# EAGLE board newMain (EAGLE 8.7.0)
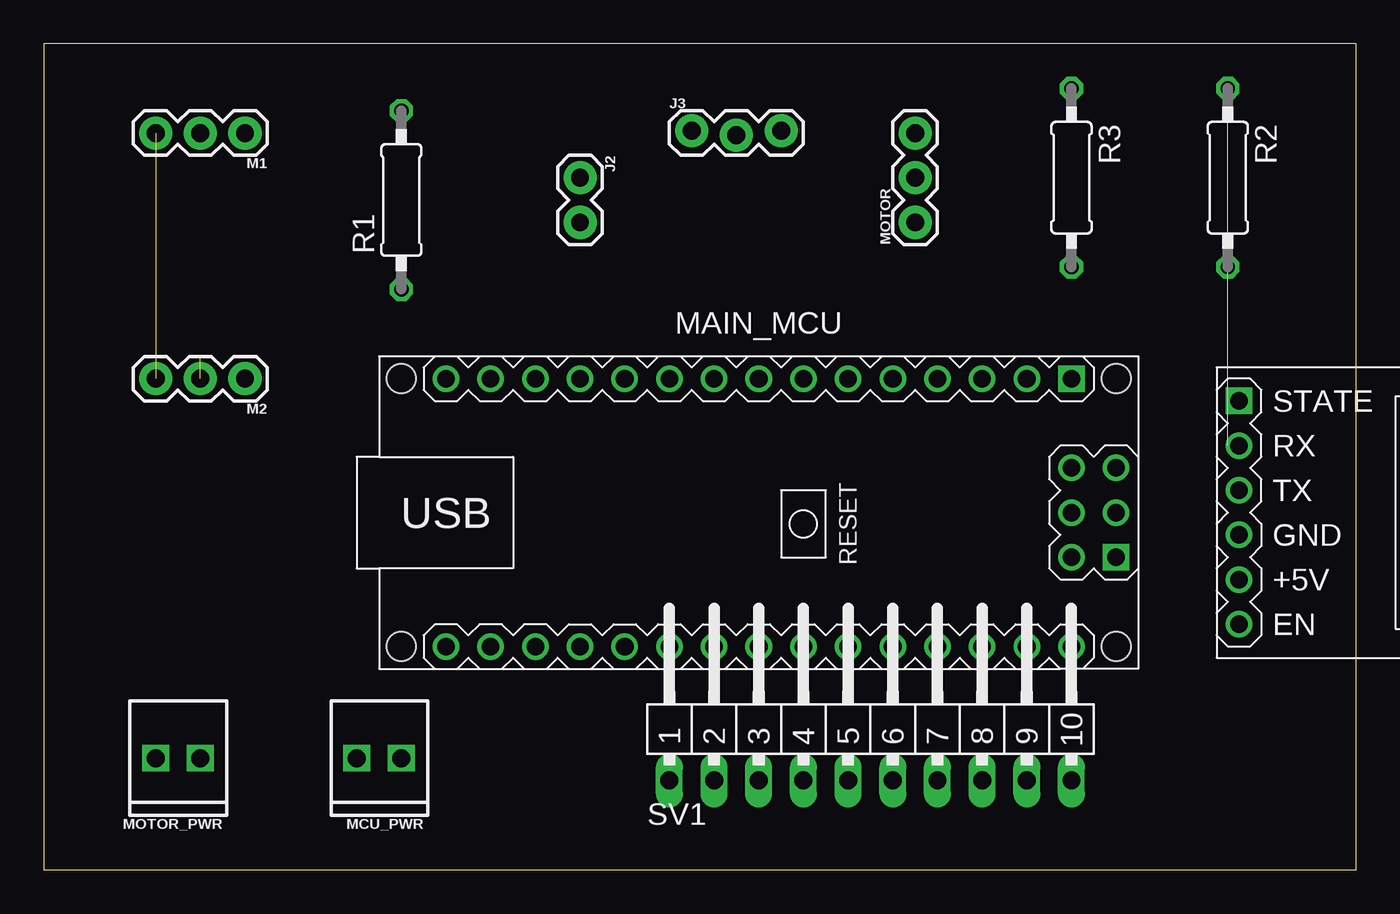
[diagram p0: board, top side]
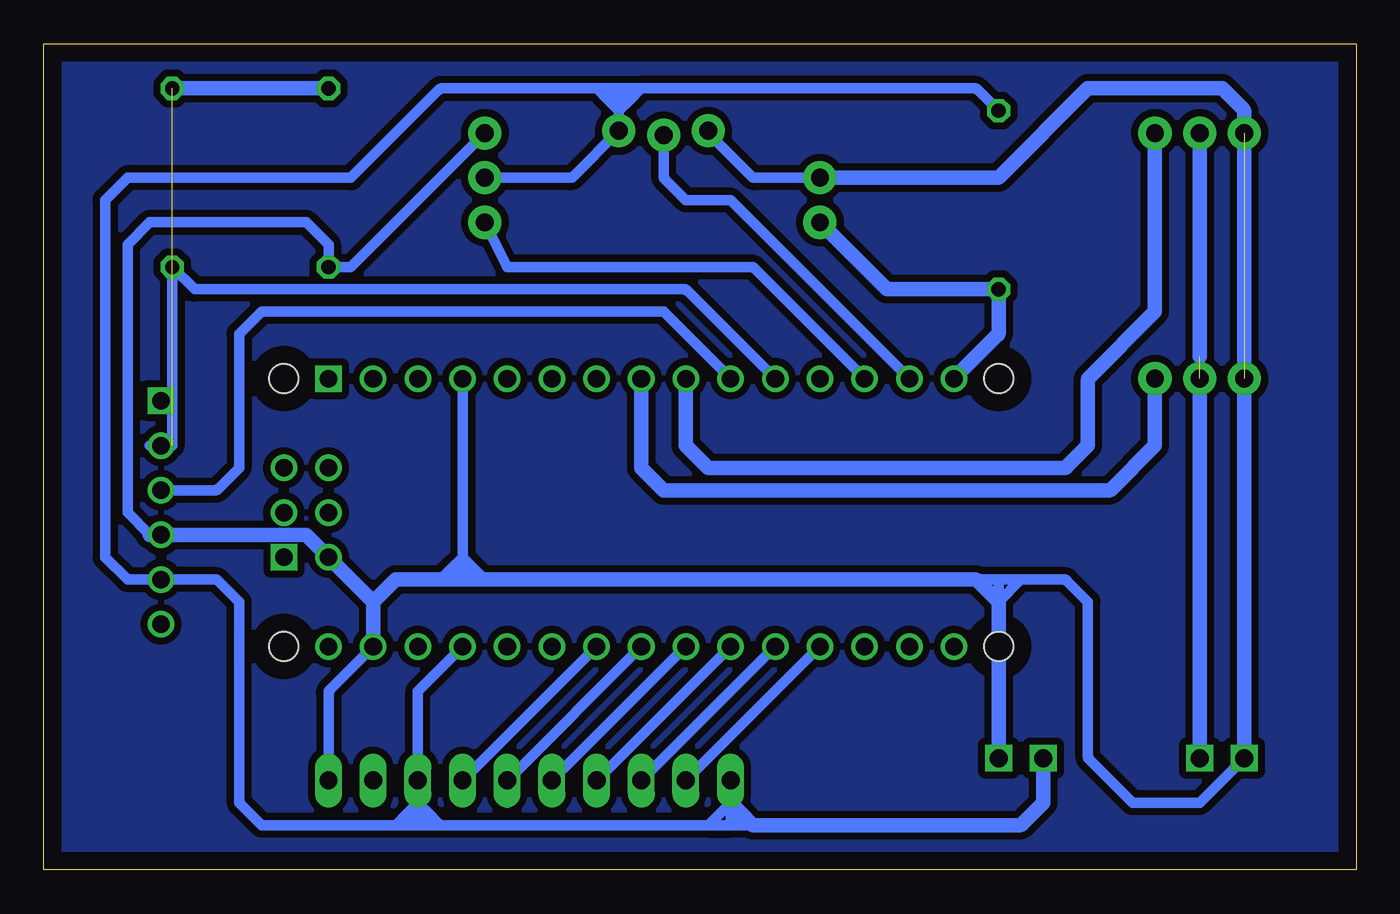
[diagram p1: board, bottom side, seen from below]

Size 74.6 x 46.98 mm. Coordinates in mm from the lower left corner, seen from the top.
Outline: 0,0 74.6,0 74.6,46.98 0,46.98 0,0
Copper layers (1*16): Top 0.035mm / dielectric 1.5mm / Bottom 0.035mm
Design rules "default": minimum track width 6mil, minimum drill 0.35mm, track to track 6mil, track to pad 6mil, pad to pad 6mil, via to via 6mil, smd to smd 6mil, copper to edge 40mil, drill to drill 6mil, minimum pad ring 10mil, minimum via ring 8mil, stop-mask expansion 4mil, vias tented up to drill 0mil, thermal gap 10mil

## Footprints (pad centres in the part's own frame; a part is rotated, then mirrored left to right if it is on the bottom)
1X02 = drill 1.016 pad 1.88: 1 0,0; 2 2.54,0
1X03_LOCK = drill 1.016 pad 1.88: 1 0,0.127; 2 2.54,-0.127; 3 5.08,0.127
1X03 = drill 1.016 pad 1.88: 1 0,0; 2 2.54,0; 3 5.08,0
ARDUINO-NANO-3.0#ISP = drill 1 square: J1.1 17.78,7.62; J4.1 20.32,-2.54 | drill 1: J1.2 15.24,7.62; J1.3 12.7,7.62; J1.4 10.16,7.62; J1.5 7.62,7.62; J1.6 5.08,7.62; J1.7 2.54,7.62; J1.8 0,7.62; J1.9 -2.54,7.62; J1.10 -5.08,7.62; J1.11 -7.62,7.62; J1.12 -10.16,7.62; J1.13 -12.7,7.62; J1.14 -15.24,7.62; J1.15 -17.78,7.62; J2.1 17.78,-7.62; J2.2 15.24,-7.62; J2.3 12.7,-7.62; J2.4 10.16,-7.62; J2.5 7.62,-7.62; J2.6 5.08,-7.62; J2.7 2.54,-7.62; J2.8 0,-7.62; J2.9 -2.54,-7.62; J2.10 -5.08,-7.62; J2.11 -7.62,-7.62; J2.12 -10.16,-7.62; J2.13 -12.7,-7.62; J2.14 -15.24,-7.62; J2.15 -17.78,-7.62; J4.2 17.78,-2.54; J4.3 20.32,0; J4.4 17.78,0; J4.5 20.32,2.54; J4.6 17.78,2.54 | hole 1.651: -20.32,7.62; -20.32,-7.62; 20.32,-7.62; 20.32,7.62
1X02_2.54_SCREWTERM = drill 1.016 square: P1 2.54,0; P2 0,0
0207/10 = drill 0.813 octagon: 1 -5.08,0; 2 5.08,0
MA10-1W = drill 1.016 long: 1 -11.43,0; 2 -8.89,0; 3 -6.35,0; 4 -3.81,0; 5 -1.27,0; 6 1.27,0; 7 3.81,0; 8 6.35,0; 9 8.89,0; 10 11.43,0
WIRELESS-BLUETOOTH-HC-05 = drill 1 square: 1 -6.35,-17.145 | drill 1: 2 -3.81,-17.145; 3 -1.27,-17.145; 4 1.27,-17.145; 5 3.81,-17.145; 6 6.35,-17.145

## Placement (x,y rotation side)
J2  [1X02]  30.48,39.37 270 top
J3  [1X03_LOCK]  36.83,41.91 0 top
M1  SERVO  [1X03]  11.43,41.91 180 top
M2  SERVO  [1X03]  11.43,27.94 180 top
MAIN_MCU  ARDUINO-NANO-3.0#ISP  [ARDUINO-NANO-3.0#ISP]  40.64,20.32 0 top
MCU_PWR  [1X02_2.54_SCREWTERM]  20.32,6.35 180 top
MOTOR  455-1750-1-ND  [1X03]  49.53,36.83 90 top
MOTOR_PWR  [1X02_2.54_SCREWTERM]  8.89,6.35 180 top
R1  1k  [0207/10]  20.32,38.1 90 top
R2  1k  [0207/10]  67.31,39.37 270 top
R3  2k  [0207/10]  58.42,39.37 270 top
SV1  [MA10-1W]  46.99,5.08 0 top
U$1  WIRELESS-BLUETOOTH-HC-05  [WIRELESS-BLUETOOTH-HC-05]  85.09,20.32 270 top

## Library data of the parts
J2 J3 MCU_PWR MOTOR_PWR = SparkFun-Connectors
M1 M2 = SparkFun-Electromechanical
MAIN_MCU U$1 = diy-modules
MOTOR = SparkFun-Connectors; PROD_ID: XXX-00000
R1-R3 = eagle-ltspice; SPICEMODEL: NONE; SPICEPREFIX: R
SV1 = con-lstb; OC_FARNELL: unknown; OC_NEWARK: unknown

## Nets
3V3: MAIN_MCU.J2.14
B0: MAIN_MCU.J2.12 SV1.2
B1: MAIN_MCU.J2.11 SV1.3
B2: MAIN_MCU.J2.10 SV1.4
B3: MAIN_MCU.J2.9 SV1.5
B4: MAIN_MCU.J2.8 SV1.6
B5: MAIN_MCU.J2.7 SV1.7
GND: J2.1 J3.1 M1.3 M2.3 MAIN_MCU.J1.4 MAIN_MCU.J2.2 MCU_PWR.P2 MOTOR.3 MOTOR_PWR.P1 R3.2 SV1.10 U$1.4
MAGNET: J2.2 MAIN_MCU.J1.15 R1.1
MOTOR: MAIN_MCU.J1.13 MOTOR.1
N$5: R2.1 R3.1 U$1.2
OPT: J3.2 MAIN_MCU.J1.14
RX_BLE: MAIN_MCU.J1.11 R2.2
RX_MAIN: MAIN_MCU.J1.2
SEV_1: M2.1 MAIN_MCU.J1.8
SEV_2: M1.1 MAIN_MCU.J1.9
TX_BLE: MAIN_MCU.J1.10 U$1.3
TX_MAIN: MAIN_MCU.J1.1
VCC_1: M1.2 M2.2 MOTOR_PWR.P2
VCC_2: J3.3 MAIN_MCU.J2.4 MCU_PWR.P1 MOTOR.2 R1.2 SV1.1 U$1.5
VIN: MAIN_MCU.J2.1

## Tracks (layer width: path | path; a pad name or v marks a point on that pad's centre or on a via)
B0
  Bottom 0.61: MAIN_MCU.J2.12 SV1.2
B1
  Bottom 0.61: MAIN_MCU.J2.11 SV1.3
B2
  Bottom 0.61: MAIN_MCU.J2.10 SV1.4
B3
  Bottom 0.61: MAIN_MCU.J2.9 SV1.5
B4
  Bottom 0.61: MAIN_MCU.J2.8 48.19,5.15 arc-45 48.26,4.97 | 48.26,4.97 48.26,3.81 | 48.26,4.97 SV1.6
B5
  Bottom 0.61: MAIN_MCU.J2.7 SV1.7
GND  (1 unrouted)
  Bottom 0.61: MOTOR.3 57.08,34.36 arc45 57.26,34.29 R3.2 58.42,35.56 59.69,36.83 68.58,36.83 69.85,35.56 69.85,20.32 68.58,19.05 | J2.1 34.19,39.37 arc45 34.36,39.44 36.83,41.91 J3.1 | MAIN_MCU.J2.2 58.35,10.23 arc-45 58.42,10.05 SV1.10 | MAIN_MCU.J1.4 50.8,17.78 | 50.8,17.78 50.8,16.51 | 52.07,16.51 51.44,17.14 | 51.44,17.14 50.8,17.78 | 51.44,17.14 50.8,16.51 | 50.8,17.78 50.17,17.14 | 50.17,17.14 49.53,16.51 | 50.17,17.14 50.8,16.51 | MOTOR_PWR.P1 8.89,3.81 12.7,3.81 15.17,6.28 arc45 15.24,6.46 15.24,15.24 16.44,16.44 arc-45 16.61,16.51 19.05,16.51 | 20.32,16.51 21.59,16.51 20.32,15.24 | 20.32,15.24 19.05,16.51 | 19.05,16.51 20.32,16.51 | 20.32,15.24 20.32,16.51
  Bottom 0.813: MCU_PWR.P2 20.32,15.24 21.52,16.44 arc-45 21.7,16.51 49.53,16.51 50.8,16.51 52.07,16.51 54.61,16.51 55.88,15.24 | 55.88,15.24 MAIN_MCU.J2.2 | MOTOR_PWR.P1 M1.3 6.35,43.08 arc-45 6.42,43.25 7.62,44.45 15.24,44.45 20.25,39.44 arc45 20.43,39.37 J2.1 | 55.88,15.24 59.62,18.98 arc-45 59.8,19.05 U$1.4 68.58,19.05
MAGNET
  Bottom 0.813: MAIN_MCU.J1.15 20.39,30.41 arc-45 20.32,30.59 R1.1 26.57,33.02 arc45 26.74,33.09 J2.2
MOTOR
  Bottom 0.61: MAIN_MCU.J1.13 34.22,34.22 arc-45 34.39,34.29 48.26,34.29 MOTOR.1
N$1
  pour Bottom (isolate 0.406): 0,46.99 74.68,46.99 arc-90 74.93,46.74 74.93,0 0.25,0 arc-90 0,0.25
N$5  (1 unrouted)
  Bottom 0.61: 68.58,24.13 U$1.2 67.31,24.13
  Bottom 0.813: R3.1 R2.1
OPT
  Bottom 0.61: MAIN_MCU.J1.14 35.49,38.03 arc-45 35.67,38.1 38.1,38.1 39.3,39.3 arc45 39.37,39.48 J3.2
RX_BLE
  Bottom 0.61: MAIN_MCU.J1.11 38.03,32.95 arc-45 38.2,33.02 66.04,33.02 R2.2 67.31,24.13
SEV_1
  Bottom 0.813: M2.1 11.43,24.13 13.9,21.66 arc45 14.07,21.59 39.37,21.59 40.64,22.86 MAIN_MCU.J1.8
SEV_2
  Bottom 0.813: MAIN_MCU.J1.9 38.1,24.13 36.9,22.93 arc-45 36.72,22.86 16.61,22.86 arc-45 16.44,22.93 15.24,24.13 15.24,27.84 arc45 15.17,28.01 11.43,31.75 M1.1
TX_BLE
  Bottom 0.61: MAIN_MCU.J1.10 39.37,31.75 62.12,31.75 arc-45 62.3,31.68 63.5,30.48 63.5,22.86 64.7,21.66 arc45 64.88,21.59 U$1.3
VCC_1  (1 unrouted)
  Bottom 0.813: MOTOR_PWR.P2 M2.2 | M1.2 8.89,29.21
VCC_2
  Bottom 0.61: R1.2 21.52,44.38 arc-45 21.7,44.45 40.64,44.45 | 41.91,43.18 J3.3 44.5,39.44 arc45 44.68,39.37 MOTOR.2 | SV1.1 35.56,3.92 arc45 35.63,3.74 36.83,2.54 | 36.83,2.54 51.97,2.54 | 51.97,2.54 arc45 52.14,2.61 52.7,3.17 | 52.7,3.17 53.34,3.81 | 53.34,3.81 53.34,10.16 MAIN_MCU.J2.4 | 53.34,3.81 53.98,3.17 | 53.98,3.17 54.61,2.54 | 54.61,2.54 62.23,2.54 63.43,3.74 arc45 63.5,3.92 63.5,15.24 64.7,16.44 arc-45 64.88,16.51 U$1.5 69.85,16.51 71.12,17.78 71.12,38.1 69.85,39.37 57.15,39.37 52.14,44.38 arc45 51.97,44.45 43.18,44.45 | 51.97,2.54 53.34,2.54 | 53.34,2.54 54.61,2.54 | 53.34,3.81 53.34,2.54 | 52.7,3.17 53.34,2.54 | 53.34,2.54 53.98,3.17 | 34.29,2.54 35.56,2.54 | 35.56,3.81 35.56,2.54 | 36.83,2.54 35.56,2.54 | 34.92,3.17 35.56,2.54 | 43.18,44.45 41.91,44.45 | 41.91,44.45 40.64,44.45 | 41.91,43.18 42.55,43.81 | 42.55,43.81 43.18,44.45 | 40.64,44.45 41.28,43.81 | 41.28,43.81 41.91,43.18 | 42.55,43.81 41.91,44.45 | 41.91,43.18 41.91,44.45 | 41.28,43.81 41.91,44.45
  Bottom 0.813: MCU_PWR.P1 17.78,3.81 18.98,2.61 arc45 19.16,2.54 34.29,2.54 34.92,3.17 35.56,3.81 SV1.1